# Altium PCB MDBU003_Layout.PcbDoc (part 2 of 2)
Units mil, origin at the board's own origin, x right, y up, seen from the top; angles counter-clockwise.
Board outline 2000 x 2200 mil, 4 copper layers (Component Side, Ground Plane, Power Plane, Solder Side), stack 31.834 mil thick; 88 components, 65 nets, 283 pads, 338 vias.
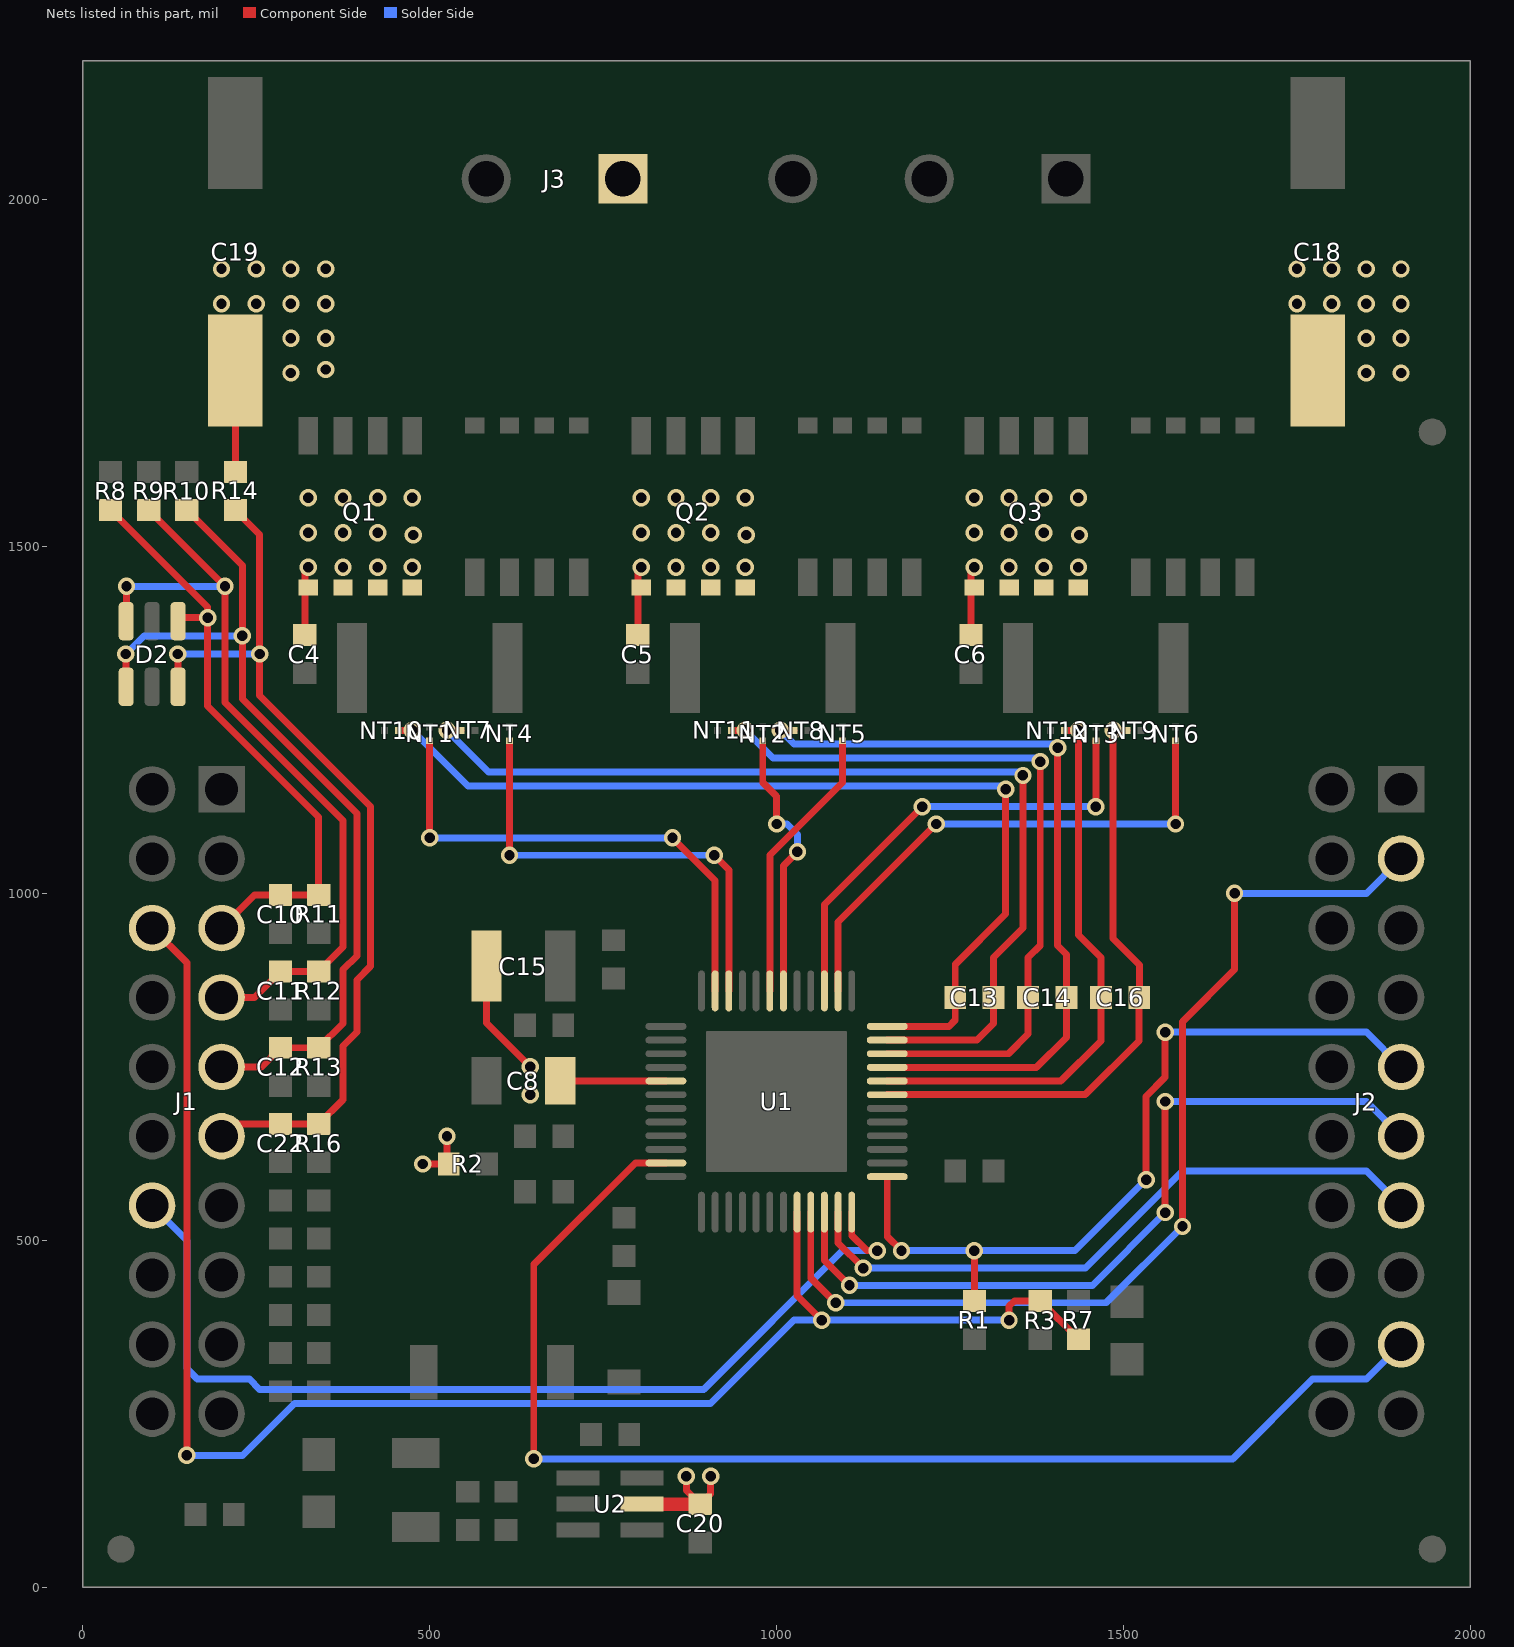
[diagram p4: the nets of this part, all layers, seen from the top]

## Via types
v1: diameter 25, hole 15, Component Side to Solder Side, tented both sides, 313 vias
v2: diameter 25, hole 13, Component Side to Solder Side, tented top, 25 vias

## Nets (pads, with @x,y where several pads share a name; then routed paths per layer and width w, separated by ;. In a path a pad name is that pad's centre, name@x,y a point inside that pad or via, vN(x,y) a via of type N, cw(c..) or ccw(c..) an arc to the next point about the centre after c; other vN are vias at no path point) (continued)
NFAULT: J1.6 R3.1 R7.1 U1.8 | length 2362.8
  Component Side w10: J1.6@100,950 150,900 v1(150,190) ; U1.8@1029.53,540.55 1029.53,420.47 v1(1065,385) ; v1(1335,385) 1335,405 1342.56,412.56 R3.1@1380,412.56 1435,357.56 R7.1@1435,357.44
  Solder Side w10: v1(150,190) 230,190 305,265 905,265 1025,385 v1(1065,385) v1(1335,385)
PVDD: C4.1 C5.1 C6.1 C8.2 C15.1 C18.1 C19.1 C20.1 J3.1 Q1.5 Q1.6 Q1.7 Q1.8 Q2.5 Q2.6 Q2.7 Q2.8 Q3.5 Q3.6 Q3.7 Q3.8 R2.2 R14.2 U1.41 U2.5 | length 1014.5
  Component Side w10: R14.2@220,1607.56 C19.1@220,1753.74 ; C4.1@320,1372.56 320,1465 v1(325,1470) ; v1(490,610) 522.56,610 525,612.44 v1(525,650) ; C15.1@581.85,895 581.85,813.15 v1(645,750) ; C8.2@688.15,730 688.62,729.53 U1.41@840.55,729.53 ; C5.1@800,1372.56 v1@800,1465 ; U2.5@806,120 U2.5@806.44,119.56 ; v1(870,160) 870,139.56 C20.1@890,119.56 905,134.56 v1(905,160) ; C6.1@1280,1372.56 1280,1465 v1(1285,1470)
  Component Side w20: U2.5@806.44,119.56 C20.1@890,119.56
  other v1: 645,710 375,1470 425,1470 475,1470 805,1470 855,1470 905,1470 955,1470 1335,1470 1385,1470 1435,1470 476.46,1516.52 956.46,1516.52 1436.46,1516.52 325,1520 375,1520 425,1520 805,1520 855,1520 905,1520 1285,1520 1335,1520 1385,1520 325,1570 375,1570 425,1570 475,1570 805,1570 855,1570 905,1570 955,1570 1285,1570 1335,1570 1385,1570 1435,1570 300,1750 1850,1750 1900,1750 350,1755 300,1800 350,1800 1850,1800 1900,1800 200,1850 250,1850 300,1850 350,1850 1750,1850 1800,1850 1850,1850 1900,1850 200,1900 250,1900 300,1900 350,1900 1750,1900 1800,1900 1850,1900 1900,1900
PWRGD: J2.9 R1.1 U1.13 | length 1167.2
  Component Side w10: U1.13@1159.45,591.73 1159.45,505.55 v1(1180,485) ; R1.1@1285,412.56 v1(1285,485) ; v1(1532.5,587.5) 1532.5,707.5 1560,735 v1(1560,800)
  Solder Side w10: v1(1180,485) v1(1285,485) 1430,485 v1(1532.5,587.5) ; v1(1560,800) 1850,800 J2.9@1900,750
SCLK: J1.14 U1.12 | length 1425.5
  Component Side w10: U1.12@1108.27,540.55 1108.27,506.73 1130,485 v1(1145,485)
  Solder Side w10: J1.14@100,550 150,500 150,315 165,300 240,300 255,285 895,285 1095,485 v1(1145,485)
SCS: J2.3 U1.9 | length 1462.7
  Component Side w10: U1.9@1049.21,540.55 1049.21,445.79 v1(1085,410) ; v1(1585,520) 1585,815 1660,890 v1(1660,1000)
  Solder Side w10: v1(1085,410) 1475,410 v1(1585,520) ; v1(1660,1000) 1850,1000 J2.3@1900,1050
SDI: J2.11 U1.10 | length 1139.7
  Component Side w10: U1.10@1068.9,540.55 1068.9,471.1 v1(1105,435) ; v1(1560,540) v1(1560,700)
  Solder Side w10: v1(1105,435) 1455,435 v1(1560,540) ; v1(1560,700) 1850,700 J2.11@1900,650
SDO: J2.13 U1.11 | length 949.3
  Component Side w10: U1.11@1088.58,540.55 1088.58,496.42 v1(1125,460)
  Solder Side w10: v1(1125,460) 1445,460 1585,600 1850.01,600 J2.13@1900,550
SH_A: NT1.1 U1.35 | length 736
  Component Side w10: v1(500,1080) NT1.1@500,1220 ; v1(850,1080) 911.42,1018.58 U1.35@911.42,859.45
  Solder Side w10: v1(500,1080) v1(850,1080)
SH_B: NT2.1 U1.30 | length 398.4
  Component Side w10: NT2.1@980,1220 980,1160 1000,1140 v1(1000,1100) ; U1.30@1009.84,859.45 1009.84,1039.84 v1(1030,1060)
  Solder Side w10: v1(1000,1100) 1015,1100 1030,1085 v1(1030,1060)
SH_C: NT3.1 U1.27 | length 669
  Component Side w10: U1.27@1068.9,859.45 1068.9,983.9 v1(1210,1125) ; v1(1460,1125) NT3.1@1460,1220
  Solder Side w10: v1(1210,1125) v1(1460,1125)
SL_A: NT4.1 U1.34 | length 664.3
  Component Side w10: v1(615,1055) NT4.1@615,1220 ; v1(910,1055) 931.1,1033.9 U1.34@931.1,859.45
  Solder Side w10: v1(615,1055) v1(910,1055)
SL_B: NT5.1 U1.31 | length 404
  Component Side w10: U1.31@990.16,859.45 990.16,1055.16 1095,1160 NT5.1@1095,1220
SL_C: NT6.1 U1.26 | length 764.1
  Component Side w10: U1.26@1088.58,859.45 1088.58,958.58 v1(1230,1100) ; v1(1575,1100) NT6.1@1575,1220
  Solder Side w10: v1(1230,1100) v1(1575,1100)
SN1: C13.1 NT7.1 U1.23 | length 1415
  Component Side w10: v1(525,1235) NT7.1@545,1235 ; U1.23@1159.45,788.58 1288.58,788.58 1312.56,812.56 C13.1@1312.56,850 1312.56,907.56 1355,950 v1(1355,1170)
  Solder Side w10: v1(525,1235) 585,1175 1350,1175 v1(1355,1170)
SN2: C14.1 NT8.1 U1.21 | length 1129.3
  Component Side w10: v1(1005,1235) NT8.1@1025,1235 ; U1.21@1159.45,749.21 1374.21,749.21 1417.56,792.56 C14.1@1417.56,850 ; v1(1405,1210) 1405,925 1418.05,911.95 C14.1@1418.05,850
  Solder Side w10: v1(1005,1235) 1025,1215 1400,1215 v1(1405,1210)
SN3: C16.1 NT9.1 U1.19 | length 878.5
  Component Side w10: U1.19@1159.45,709.84 1444.84,709.84 1522.56,787.56 C16.1@1522.56,850 ; NT9.1@1505,1235 v1(1485,1235) 1485,935 1523.05,896.95 C16.1@1523.05,850
SP1: C13.2 NT10.1 U1.24 | length 1374.6
  Component Side w10: NT10.1@455,1235 v1(475,1235) ; U1.24@1159.45,808.27 1248.27,808.27 1257.44,817.44 C13.2@1257.44,850 1257.44,897.44 1330,970 v1(1330,1150)
  Solder Side w10: v1(475,1235) 555,1155 1325,1155 v1(1330,1150)
SP2: C14.2 NT11.1 U1.22 | length 1078.3
  Component Side w10: NT11.1@935,1235 v1(955,1235) ; U1.22@1159.45,768.9 1333.9,768.9 1362.44,797.44 C14.2@1362.44,850 1362.44,907.44 1380,925 v1(1380,1190)
  Solder Side w10: v1(955,1235) 995,1195 1375,1195 v1(1380,1190)
SP3: C16.2 NT12.1 U1.20 | length 813
  Component Side w10: U1.20@1159.45,729.53 1409.53,729.53 1467.44,787.44 C16.2@1467.44,850 1467.44,907.56 1435,940 v1(1435,1235) NT12.1@1415,1235
VSEN_A: C10.1 D2.1 J1.5 R8.1 R11.2 | length 883.6
  Component Side w10: R8.1@40,1552.44 180,1412.44 v1(180,1397.44) ; D2.1@137.4,1392.24 142.6,1397.44 v1(180,1397.44) ; J1.5@200,950 247.56,997.56 R11.2@340,997.56 340,1110 180,1270 v1(180,1397.44)
VSEN_B: C11.1 D2.3 J1.7 R9.1 R12.2 | length 1143.3
  Component Side w10: D2.3@62.6,1392.24 63,1392.65 v1(63,1442.44) ; R9.1@95,1552.44 v1(205,1442.44) 205,1275 375,1105 375,922.56 R12.2@340,887.56 C11.1@285,887.56 247.44,850 J1.7@200,850
  Solder Side w10: v1(63,1442.44) v1(205,1442.44)
VSEN_C: C12.1 D2.4 J1.9 R10.1 R13.2 | length 1276.9
  Component Side w10: v1(62,1345) 62,1298.35 D2.4@62.6,1297.76 ; R10.1@150,1552.44 230,1472.44 230,1280 395,1115 395,910 375,890 375,812.56 R13.2@340,777.56 C12.1@285,777.56 257.44,750 J1.9@200,750
  Solder Side w10: v1(62,1345) 88.22,1371.22 v1(230,1371.22)
VSEN_PVDD: C22.1 D2.6 J1.11 R14.1 R16.2 | length 1308.9
  Component Side w10: v1(137,1345) 137,1298.16 D2.6@137.4,1297.76 ; J1.11@200,650 217.56,667.56 R16.2@340,667.56 375,702.56 375,780 395,800 395,875 415,895 415,1125 255,1285 255,1516.95 R14.1@220,1551.95
  Solder Side w10: v1(137,1345) v1(255,1345)
WAKE: J2.17 U1.47 | length 1849.5
  Component Side w10: v1(650,185) 650,465 796.42,611.42 U1.47@840.55,611.42
  Solder Side w10: v1(650,185) 1657.44,185 1772.44,300 1850,300 J2.17@1900,350
pads on no net: FID1.1 FID2.1 FID3.1 J1.1 J1.4 J1.8 J1.10 J1.12 J1.16 J1.18 J1.19 J1.20 J2.5 J2.7 J2.14 J2.16 J2.18 J2.19 J2.20 U2.4

## Polygon pours and split planes (outlines as drawn)
GND on Component Side "TOP_GND" (solid, remove dead copper, pour order 60): 0,2200 2000,2200 2000,0 0,0
PVDD on Component Side "PVDD3" (solid, remove dead copper, pour order 56): 630,768.39 650,768.39 656.61,768.39 660,765 682.24,765 682.24,695 681.81,694.57 630,694.57
PVDD on Component Side "PVDD2" (solid, remove dead copper, pour order 55): 1730,1920 1730,1670 1830,1670 1855.71,1670 1920.71,1735 1920,1735.71 1920,1920
PVDD on Component Side "PVDD1" (solid, remove dead copper, pour order 54): 180,1920 180,1670 265,1670 320,1725 340,1725 350.71,1725 370,1744.29 375,1749.29 375,1920
MOT_A on Component Side "MOT_A" (solid, remove dead copper, pour order 51): 1115,2080 1115,2005 1115,1995 1075,1955 830,1710 775,1710 765.96,1710 728.98,1673.02 728.98,1521.44 551.02,1521.44 550,1522.47 550,1565 550,1590 510,1630 355,1630 355,1690 565,1900 800,1900 910,2010 910,2080
MOT_C on Component Side "MOT_C" (solid, remove dead copper, pour order 53): 1315,2080 1315,1630 1450,1630 1460,1630 1510,1580 1511.02,1578.98 1511.02,1521.44 1688.98,1521.44 1690,1522.47 1690,1695 1690,1865 1475,2080
MOT_B on Component Side "MOT_B" (solid, remove dead copper, pour order 52): 1295,2080 1295,1800 1295,1759.04 1208.98,1673.02 1208.98,1521.44 1031.02,1521.44 1030,1522.47 1030,1585 1030,1586.3 986.3,1630 835,1630 835,1690 1135,1990 1135,2080
GND on Component Side "GND_C" (solid, remove dead copper, pour order 50): 1315,1405 1435,1405 1435,1260 1315,1260
GND on Component Side "GND_B" (solid, remove dead copper, pour order 49): 835,1405 955,1405 955,1260 835,1260
GND on Component Side "GND_A" (solid, remove dead copper, pour order 48): 355,1405 475,1405 475,1260 355,1260
NetNT6_2 on Component Side "SL_C" (solid, remove dead copper, pour order 45): 1645,1490 1525,1490 1510,1490 1505,1485 1505,1410 1505,1400 1485,1380 1485,1295 1485,1275 1485,1260 1645,1260
NetNT5_2 on Component Side "SL_B" (solid, remove dead copper, pour order 47): 1165,1490 1045,1490 1030,1490 1025,1485 1025,1410 1025,1400 1005,1380 1005,1295 1005,1275 1005,1260 1165,1260
NetNT4_2 on Component Side "SL_A" (solid, remove dead copper, pour order 46): 685,1490 565,1490 550,1490 545,1485 545,1410 545,1400 525,1380 525,1295 525,1275 525,1260 685,1260
PVDD on Solder Side "PVDD_C_BOT" (solid, remove dead copper, pour order 59): 1450,1677.17 1450,1425 1270,1425 1270,1677.17
PVDD on Solder Side "PVDD_B_BOT" (solid, remove dead copper, pour order 58): 970,1677.17 970,1425 790,1425 790,1677.17
PVDD on Solder Side "PVDD_A_BOT" (solid, remove dead copper, pour order 57): 490,1677.17 490,1425 310,1425 310,1677.17
GND on Solder Side "GND_BOT" (solid, remove dead copper, pour order 61): 0,2200 2000,2200 2000,0 0,0
MOT_C on Solder Side "MOT_C_BOT" (solid, remove dead copper, pour order 44): 1465,1490 1735,1490 1735,1825 1465,1825
MOT_B on Solder Side "MOT_B_BOT" (solid, remove dead copper, pour order 43): 985,1490 1255,1490 1255,1825 985,1825
MOT_A on Solder Side "MOT_A_BOT" (solid, remove dead copper, pour order 42): 505,1490 775,1490 775,1825 505,1825
GND on Ground Plane (split plane): 1979.9,20.1 20.1,20.1 20.1,2179.9 1979.9,2179.9
PVDD on Power Plane (split plane): 1979.9,20.1 20.1,20.1 20.1,2179.9 1979.9,2179.9

## Keep-outs
Keep-Out Layer:
  lines w10: 0,0 2000,0 ; 0,0 0,0 ; 0,0 0,2200 2000,2200 2000,0 ; 2000,0 2000,0
  text ".Layer_Name" at 577,-858.49 h60

## Other copper
Component Side:
  text ".Layer_Name" at 577,-858.49 h60
Solder Side:
  text ".Layer_Name" at 577,-858.49 h60

## Silkscreen, mask and mechanical layers (free items; w line width, h text height)
Top Overlay:
  text "GND" at 505,1765 h40
  text "PVDD" at 715,1765 h40
  text "MOTA" at 930,1765 h40
  text "MOTB" at 1140,1765 h40
  text "MOTC" at 1365,1765 h40
  text "DRV8305" at 870,925 h40
  text "nFAULT" at 1420,470 h30
  text ".PRJ_Number" at 1212,93 h30
  text "BOOSTXL-DRV8305EVM REVA" at 1210,35 h30
  text "3.3V" at 285,20 h30
  text ".Layer_Name" at 577,-858.49 h60
Bottom Overlay:
  text ".Layer_Name" at 577,-858.49 h60
Top Paste:
  text ".Layer_Name" at 577,-858.49 h60
Bottom Paste:
  text ".Layer_Name" at 577,-858.49 h60
Top Solder:
  text ".Layer_Name" at 577,-858.49 h60
  text ".Layer_Name" at 577,-858.49 h60
Bottom Solder:
  text ".Layer_Name" at 577,-858.49 h60
Drill Guide:
  text ".Layer_Name" at 577,-858.49 h60
Mechanical 1:
  lines w10: 2000,0 2000,2200 ; 2000,0 2000,0 ; 2000,0 0,0 0,2200 2000,2200 ; 2000,2200 2000,2200
  text ".Layer_Name" at 577,-858.49 h60
Mechanical 2:
  rectangle: 125,-400 500,-275
  rectangle: 0,-275 125,-150
  lines w7: 0,-275 1000,-275 ; 125,-400 125,-150 ; 250,-400 250,-150 ; 500,-400 500,-150 ; 750,-400 750,-150 ; 0,-400 0,-150 1000,-150 1000,-400 0,-400
  text ".Layer_Name" at 577,-858.49 h60
Mechanical 3:
  text ".Layer_Name" at 577,-858.49 h60
Mechanical 4:
  text ".Layer_Name" at 577,-858.49 h60
Mechanical 5:
  lines w10: -292,-930.17 6308,-930.17 ; -292,-726.83 6310,-726.83 ; -292,-523.5 -292,-1133.5 3713,-1133.5 6310,-1133.5 6310,-523.5 -291.5,-523.5 -291.5,-1133.5 1284,-1133.5 ; 2173,-1133.5 2173,-523.5 ; 3440,-726.83 3440,-523.5 ; 4280,-726.83 4280,-523.5 ; 4902,-1140 4902,-937.17
  text "COMPONENTS MARKED 'DNP' SHOULD NOT BE POPULATED." at 1153.5,-318.5 h60
  text "ASSEMBLY VARIANT:" at 1153,-434 h60
  text ".VariantName" at 2189,-434 h60
  text "PCB VIEWED FROM TOP SIDE" at -228.5,-655.67 h60
  text "BOARD #:" at 2248,-655.67 h60
  text ".PRJ_Number" at 2793.5,-655.67 h60
  text "REV:" at 3638,-655.67 h60
  text ".PCB_Rev" at 3929.5,-655.67 h60
  text "SVN REV:" at 4476,-655.67 h60
  text ".VersionControl_RevNumber" at 4982,-655.67 h60
  text "PLOT NAME =" at -228.5,-1064.34 h60
  text ".plot_File_Name" at 577,-1064.34 h60
  text "GENERATED    :" at 2250,-1064.34 h60
  text ".Print_Date" at 3119.5,-1064.34 h60
  text ".Print_Time" at 3848.5,-1064.34 h60
  text "TEXAS INSTRUMENTS" at 5113,-1064.34 h60
Mechanical 6:
  lines w10: -292.5,-727.33 6309.5,-727.33 ; -290.5,-930.67 6309.5,-930.67 ; 1115.5,-1140.5 1115.5,-937.67 ; 1737.5,-727.33 1737.5,-524 ; 2577.5,-727.33 2577.5,-524 ; 3844.5,-1134 3844.5,-524 ; 4733.5,-1134 6309,-1134 6309,-524 -292.5,-524 -292.5,-1134 2304.5,-1134 6309.5,-1134 6309.5,-524
  text "COMPONENTS MARKED 'DNP' SHOULD NOT BE POPULATED." at 6102,-318 h60
  text ".VariantName" at 5058,-434 h60
  text "ASSEMBLY VARIANT:" at 6097,-434 h60
  text ".VersionControl_RevNumber" at 1035.5,-656.17 h60
  text "SVN REV:" at 1541.5,-656.17 h60
  text ".PCB_Rev" at 2088,-656.17 h60
  text "REV:" at 2379.5,-656.17 h60
  text ".PRJ_Number" at 3224,-656.17 h60
  text "BOARD #:" at 3769.5,-656.17 h60
  text "PCB VIEWED FROM BOTTOM SIDE" at 6246,-656.17 h60
  text "TEXAS INSTRUMENTS" at 904.5,-1064.84 h60
  text ".Print_Time" at 2169,-1064.84 h60
  text ".Print_Date" at 2898,-1064.84 h60
  text "GENERATED    :" at 3767.5,-1064.84 h60
  text ".plot_File_Name" at 5440.5,-1064.84 h60
  text "PLOT NAME =" at 6246,-1064.84 h60
Mechanical 9:
  drawing of 57 lines, arcs and shapes, not listed
  text "1" at 739.84,8036.5 h70
  text "2" at 3235.5,8036.5 h70
  text "3" at 5724.84,8036.5 h70
  text "4" at 8231.51,8036.5 h70
  text "5" at 10730.5,8036.5 h70
  text "6" at 13235.5,8036.5 h70
  text "A" at -416.5,6893.5 h70
  text "A" at 14383.5,6893.5 h70
  text "B" at -416.5,4513.5 h70
  text "B" at 14383.5,4513.5 h70
  text "C" at -416.5,2138.5 h70
  text "C" at 14383.5,2138.5 h70
  text "PROJECT TITLE:" at 11343.5,277.5 h45
  text ".PRJ_Title" at 11393.5,144.17 h70
  text "DESIGNED FOR:" at 11343.5,-23.5 h45
  text ".PRJ_Customer" at 11393.5,-163.5 h70
  text "D" at -416.5,-231.5 h70
  text "D" at 14383.5,-231.5 h70
  text "FILE NAME:" at 11343.5,-323.5 h45
  text ".PCB_File_Name_No_Path" at 11393.5,-443.5 h70
  text "Texas Instruments (TI) and/or its licensors do not warrant the accuracy or completeness of this specification" at 6374,-605.34 h45
  text "ENGINEER:" at 11343.5,-613.5 h45
  text "LAYOUT BY:" at 12848.5,-613.5 h45
  text "or any information contained therein. TI and/or its licensors do not warrant that this design will meet" at 6329.01,-718 h45
  text ".PRJ_Engineer" at 11393.5,-768.49 h70
  text ".PCB_Layout" at 12899,-768.49 h70
  text "the specifications, will be suitable for your application or fit for any particular purpose, or will operate in" at 6329.01,-830.67 h45
  text ".Layer_Name" at 577,-858.49 h60
  text "ALTIUM DESIGNER VERSION:" at 12848.5,-923.5 h45
  text "an implementation. TI and/or its licensors do not warrant that the design is production worthy. You should" at 6329.01,-943.33 h45
  text "completely validate and test your design implementation to confirm the system functionality for your application." at 6374,-1056 h45
  text ".print_Scale" at 11393.5,-1056.83 h70
  text ".Application_BuildNumber" at 12899,-1056.83 h70
  text "1" at 739.84,-1263.5 h70
  text "2" at 3235.5,-1263.5 h70
  text "3" at 5724.84,-1263.5 h70
  text "4" at 8231.51,-1263.5 h70
  text "5" at 10730.5,-1263.5 h70
  text "6" at 13235.5,-1263.5 h70
Mechanical 10:
  drawing of 185 lines, arcs and shapes, not listed
  text "DESIGN INFORMATION" at 12381.02,5910 h60
  text "MIN. TRACK WIDTH:" at 11736.46,5730 h60
  text "8" at 12832.7,5730 h60
  text "MIL" at 12987.46,5730 h60
  text "MIN. CLEARANCE:" at 11736.46,5598 h60
  text "0.2" at 12772.7,5598 h60
  text "mm" at 12987.46,5598 h60
  text "MIN. VIA PAD SIZE:" at 11736.46,5466 h60
  text "24" at 12802.71,5466 h60
  text "MIL" at 12987.46,5466 h60
  text "0.05mm (2MIL)" at 12431.46,5324.29 h60
  text "MINIMUM ANNULAR RING" at 11407.23,5320 h60
  text "EXTERNAL" at 13139.46,5320 h60
  text "PER" at 11607.23,5202 h60
  text "IPC-D-275 CLASS 2 LEVEL C" at 11827.23,5202 h60
  text "MIL, HOLES" at 13315.46,5089.71 h60
  text "+/-" at 12923,5089 h60
  text "+/-" at 13777,5089 h60
  text "REGISTRATION TOLERANCES:" at 11407.23,5084 h60
  text "METAL" at 12607,5084 h60
  text "5" at 13183.2,5084 h60
  text "3" at 14016.2,5084 h60
  text "MIL" at 14132.46,5084 h60
  text "MATERIAL:" at 11332.46,4874.54 h60
  text "FR-4 High Tg" at 12318.9,4734.21 h60
  text "FR-408" at 11753.46,4725.64 h60
  text "X" at 12165.46,4725.64 h60
  text "OTHER" at 13241.46,4725.64 h60
  text "62 MIL (1.6mm) +/-10%" at 12073.56,4562.92 h60
  text "THICKNESS:" at 11407.23,4558.64 h60
  text "X" at 11945.4,4558.64 h60
  text "OTHER" at 13358.46,4558.64 h60
  text "TOLERANCE:" at 11407.23,4400.64 h60
  text "X" at 12246.53,4400.64 h60
  text "ANSI IPC-6012 TYPE 3 CLASS 2" at 12433.48,4400.64 h60
  text "OTHER +/-" at 12433.46,4244.64 h60
  text "BOW & TWIST:" at 11407.23,4087.64 h60
  text "X" at 12246.53,4087.64 h60
  text "ANSI IPC-6012 TYPE 3 CLASS 2" at 12433.48,4087.64 h60
  text "OTHER +/-" at 12433.46,3929.13 h60
  text "DRILLING:" at 11332.46,3790.64 h60
  text "REFERENCE:" at 11407.23,3673.64 h60
  text "X" at 12055.46,3673.64 h60
  text "AS SHOWN" at 12242.46,3673.64 h60
  text "X" at 12956.46,3673.64 h60
  text "NC_DRILL FILES" at 13093.46,3673.64 h60
  text "PTH MIN COPPER THICKNESS:" at 11407.23,3515.64 h60
  text "X" at 12757.46,3515.64 h60
  text "1MIL" at 12894.46,3515.64 h60
  text "OTHER" at 13391.46,3515.64 h60
  text "BOARD FINISH:" at 11332.46,3356.64 h60
  text "SILKSCREEN:" at 11487.68,3238.64 h60
  text "X" at 12436.46,3238.64 h60
  text "TOP" at 12562.46,3238.64 h60
  text "X" at 12946.46,3238.64 h60
  text "BOTTOM" at 13073.46,3238.64 h60
  text "SILKSCREEN COLOR:" at 11487.68,3071.64 h60
  text "X" at 12435.42,3071.64 h60
  text "WHITE" at 12562.46,3071.64 h60
  text "OTHER" at 13073.46,3071.64 h60
  text "SOLDER RESIST COLOR:" at 11487.68,2901.64 h60
  text "RED" at 13773.46,2748.44 h60
  text "X" at 13163,2745 h60
  text "GREEN" at 12182.46,2742.44 h60
  text "BLUE" at 12773.46,2742.44 h60
  text "OTHER" at 13311.46,2742.44 h60
  text "IMMERSION GOLD (ENIG)" at 12393.46,2553.92 h60
  text "ENEPIG" at 13731,2550.64 h60
  text "SURFACE FINISH:" at 11332.46,2549.64 h60
  text "X" at 12206.51,2549.64 h60
  text "IMM. TIN/SILVER OR EQUIV" at 11662,2392.64 h60
  text "OTHER" at 13093.46,2392.64 h60
  text "ARRAY/PANEL:" at 11332.46,2213.64 h60
  text "CUT AND TRIM PER MECH LAYER 1" at 12393.46,2209.35 h60
  text "N.C. ROUTE" at 12393.46,2057.64 h60
  text "X" at 13072.46,2057.64 h60
  text "V. SCORE" at 13259.46,2057.64 h60
  text "CERTIFICATION:" at 11332.46,1920.64 h60
  text "MATERIALS AND WORKMANSHIP FOR ALL PCBS" at 12057.46,1920.64 h60
  text "TO MEET OR EXCEED THE REQUIREMENTS OF:" at 12057.46,1822.64 h60
  text "X" at 11683.96,1686.13 h60
  text "ANSI IPC-A-600F CLASS ->" at 11822.96,1686.13 h60
  text "X" at 13462.02,1686.13 h60
  text "2" at 13580.96,1686.14 h60
  text "1" at 13265.96,1684.64 h60
  text "3" at 13934.96,1684.64 h60
  text "X" at 11686.02,1526.64 h60
  text "UL 94V-0" at 11822.96,1526.64 h60
  text "X" at 12498.02,1526.64 h60
  text "RoHS" at 12634.96,1526.64 h60
  text "OTHER" at 13279.36,1526.64 h60
  text "PER ORDER" at 13676.42,1526.64 h60
  text "ADDITIONAL REQUIREMENTS:" at 11332.46,1385.64 h60
  text "MICROSECTION:" at 11407.23,1270.64 h60
  text "YES" at 12312.96,1270.64 h60
  text "REQUIRED" at 13174.46,1114.49 h60
  text "BARE BOARD ELEC. TEST:" at 11407.23,1111.64 h60
  text "NONE" at 12712.96,1111.64 h60
  text "X" at 13047.46,1111.64 h60
  text "PER ORDER" at 13766.46,1111.64 h60
  text "MANUFACTURER'S UL:" at 11407.23,954.64 h60
  text "RAIL" at 12572.96,950.35 h60
  text "METAL" at 13064.77,950.35 h60
  text "X" at 13440,950 h60
  text "SILK" at 13576.46,950.35 h60
  text ".Layer_Name" at 577,-858.49 h60
Mechanical 11:
  lines w10: -292,-930.17 6308,-930.17 ; -292,-726.83 6310,-726.83 ; -292,-523.5 -292,-1133.5 3713,-1133.5 6310,-1133.5 6310,-523.5 -291.5,-523.5 -291.5,-1133.5 1284,-1133.5 ; 2173,-1133.5 2173,-523.5 ; 3440,-726.83 3440,-523.5 ; 4280,-726.83 4280,-523.5 ; 4902,-1140 4902,-937.17
  text "ALL ARTWORK VIEWED FROM TOP SIDE" at -228.5,-655.67 h60
  text "BOARD #:" at 2248,-655.67 h60
  text ".PRJ_Number" at 2793.5,-655.67 h60
  text "REV:" at 3638,-655.67 h60
  text ".PCB_Rev" at 3929.5,-655.67 h60
  text "SVN REV:" at 4476,-655.67 h60
  text ".VersionControl_RevNumber" at 4982,-655.67 h60
  text "LAYER NAME =" at -228.5,-858.49 h60
  text "PLOT NAME =" at -228.5,-1064.34 h60
  text ".plot_File_Name" at 577,-1064.34 h60
  text "GENERATED    :" at 2250,-1064.34 h60
  text ".Print_Date" at 3119.5,-1064.34 h60
  text ".Print_Time" at 3848.5,-1064.34 h60
  text "TEXAS INSTRUMENTS" at 5113,-1064.34 h60
Mechanical 12:
  drawing of 295 lines, arcs and shapes, not listed
  text "Layer" at 81.35,4317 h60
  text "Name" at 491.26,4317 h60
  text "Material" at 1431,4317 h60
  text "Thickness" at 2290.77,4317 h60
  text "Constant" at 2940.6,4317 h60
  text "Board Layer Stack" at 3510.46,4317 h60
  text "1" at 81.35,4197 h60
  text "Top Overlay" at 491.26,4197 h60
  text "2" at 81.35,4077 h60
  text "Top Solder" at 491.26,4077 h60
  text "Solder Resist" at 1431,4077 h60
  text "0.40mil" at 2290.77,4077 h60
  text "3.5" at 2940.6,4077 h60
  text "3" at 81.35,3957 h60
  text "Component Side" at 491.26,3957 h60
  text "Copper" at 1431,3957 h60
  text "2.00mil" at 2290.77,3957 h60
  text "4" at 81.35,3837 h60
  text "Dielectric 1" at 491.26,3837 h60
  text "FR-4" at 1431,3837 h60
  text "10.00mil" at 2290.77,3837 h60
  text "4.2" at 2940.6,3837 h60
  text "5" at 81.35,3717 h60
  text "Ground Plane" at 491.26,3717 h60
  text "Copper" at 1431,3717 h60
  text "1.42mil" at 2290.77,3717 h60
  text "6" at 81.35,3597 h60
  text "Dielectric 3" at 491.26,3597 h60
  text "5.00mil" at 2290.77,3597 h60
  text "4.2" at 2940.6,3597 h60
  text "7" at 81.35,3477 h60
  text "Power Plane" at 491.26,3477 h60
  text "Copper" at 1431,3477 h60
  text "1.42mil" at 2290.77,3477 h60
  text "8" at 81.35,3357 h60
  text "Dielectric 4" at 491.26,3357 h60
  text "10.00mil" at 2290.77,3357 h60
  text "4.2" at 2940.6,3357 h60
  text "9" at 81.35,3237 h60
  text "Solder Side" at 491.26,3237 h60
  text "Copper" at 1431,3237 h60
  text "2.00mil" at 2290.77,3237 h60
  text "10" at 81.35,3117 h60
  text "Bottom Solder" at 491.26,3117 h60
  text "Solder Resist" at 1431,3117 h60
  text "0.40mil" at 2290.77,3117 h60
  text "3.5" at 2940.6,3117 h60
  text "11" at 81.35,2997 h60
  text "Bottom Overlay" at 491.26,2997 h60
  text ".Layer_Name" at 577,-858.49 h60
Mechanical 13:
  text ".Layer_Name" at 577,-858.49 h60
Mechanical 14:
  text ".Layer_Name" at 577,-858.49 h60
Mechanical 15:
  text ".Layer_Name" at 577,-858.49 h60
Mechanical 16:
  text ".Layer_Name" at 577,-858.49 h60
Drill Drawing:
  lines w1: 5667.61,2760.66 5680.05,2760.66 5692.5,2748.22 5704.94,2760.66 5717.39,2760.66 5704.94,2773.11 5717.39,2785.55 5704.94,2785.55 5692.5,2798 5680.05,2785.55 5667.61,2785.55 5680.05,2773.11 5667.61,2760.66 ; 5667.61,2947.33 5717.39,2947.33 5692.5,2897.55 5667.61,2947.33 ; 5667.61,3046.89 5692.5,3059.33 5717.39,3046.89 5704.94,3071.78 5717.39,3096.67 5692.5,3084.22 5667.61,3096.67 5680.05,3071.78 5667.61,3046.89 ; 5667.61,3196.23 5717.39,3196.23 5717.39,3246 5667.61,3246 5667.61,3196.23 ; 5667.83,2760.64 5680.27,2760.64 5692.72,2748.2 5705.16,2760.64 5717.6,2760.64 5705.16,2773.08 5717.6,2785.53 5705.16,2785.53 5692.72,2797.97 5680.27,2785.53 5667.83,2785.53 5680.27,2773.08 5667.83,2760.64 ; 5667.83,2947.29 5717.6,2947.29 5692.72,2897.52 5667.83,2947.29 ; 5667.83,3046.84 5692.72,3059.28 5717.6,3046.84 5705.16,3071.72 5717.6,3096.61 5692.72,3084.17 5667.83,3096.61 5680.27,3071.72 5667.83,3046.84 ; 5667.83,3196.16 5717.6,3196.16 5717.6,3245.93 5667.83,3245.93 5667.83,3196.16
  lines w12: 5599.77,2703.42 7718.02,2703.42 5600,2703.4 ; 5599.77,3300.76 7718.02,3300.76 ; 5600,3300.68 7718.02,3300.68 ; 5970.17,2554.08 5970.17,3450.1 ; 5970.36,2554.08 5970.36,3450 ; 6327.21,2554.08 6327.21,3450.1 ; 6327.36,2554.08 6327.36,3450 ; 6988.85,2554.08 6988.85,3450.1 ; 6988.93,2554.08 6988.93,3450 ; 7273.02,2554.08 7273.02,3450.1 ; 7273.07,2554.08 7273.07,3450 ; 7718.02,2554.08 5600,2554.08 5600,3450 7718.02,3450 7718.02,2554.08 ; 7718.02,2554.08 5599.77,2554.08 5599.77,3450.1 7718.02,3450.1 7718.02,2554.08
  text "Symbol" at 5689.59,3345.48 h72
  text "Symbol" at 5689.59,3345.48 h72
  text "Quantity" at 6015.16,3345.48 h72
  text "Quantity" at 6015.16,3345.48 h72
  text "Finished Hole Size" at 6372.16,3345.48 h72
  text "Finished Hole Size" at 6372.16,3345.48 h72
  text "Plated" at 7033.72,3345.48 h72
  text "Plated" at 7033.72,3345.48 h72
  text "Hole Type" at 7317.86,3345.48 h72
  text "Hole Type" at 7317.86,3345.48 h72
  text "25" at 6015.16,3196.16 h60
  text "25" at 6015.16,3196.16 h60
  text "13.00mil (0.330mm)" at 6372.16,3196.16 h60
  text "13.00mil (0.330mm)" at 6372.16,3196.16 h60
  text "PTH" at 7033.72,3196.16 h60
  text "PTH" at 7033.72,3196.16 h60
  text "Round" at 7317.86,3196.16 h60
  text "Round" at 7317.86,3196.16 h60
  text "313" at 6015.16,3046.84 h60
  text "313" at 6015.16,3046.84 h60
  text "15.00mil (0.381mm)" at 6372.16,3046.84 h60
  text "15.00mil (0.381mm)" at 6372.16,3046.84 h60
  text "PTH" at 7033.72,3046.84 h60
  text "PTH" at 7033.72,3046.84 h60
  text "Round" at 7317.86,3046.84 h60
  text "Round" at 7317.86,3046.84 h60
  text "40" at 6015.16,2897.52 h60
  text "40" at 6015.16,2897.52 h60
  text "47.24mil (1.200mm)" at 6372.16,2897.52 h60
  text "47.24mil (1.200mm)" at 6372.16,2897.52 h60
  text "PTH" at 7033.72,2897.52 h60
  text "PTH" at 7033.72,2897.52 h60
  text "Round" at 7317.86,2897.52 h60
  text "Round" at 7317.86,2897.52 h60
  text "5" at 6015.16,2748.2 h60
  text "5" at 6015.16,2748.2 h60
  text "51.18mil (1.300mm)" at 6372.16,2748.2 h60
  text "51.18mil (1.300mm)" at 6372.16,2748.2 h60
  text "PTH" at 7033.72,2748.2 h60
  text "PTH" at 7033.72,2748.2 h60
  text "Round" at 7317.86,2748.2 h60
  text "Round" at 7317.86,2748.2 h60
  text "383 Total" at 6015.16,2598.88 h60
  text "383 Total" at 6015.16,2598.88 h60
  text ".Layer_Name" at 577,-858.49 h60

## Dimensions
0,0 to 2000,0 on Mechanical 2
0,0 to 0,2200 on Mechanical 2
0,-400 to 1000,-400 on Mechanical 2

## Text inside footprints (layer, text, board x,y; h text height)
Logo2: Bottom Overlay "Pb" at 329.6,81.1 h60
Logo3: Bottom Overlay "For evaluation only; not FCC approved for resale." at 1698.94,84.38 h60
ZZ1: Mechanical 5 "Install label in silkscreened box after final wash.  Text shall be 8 pt font.  Text shall be per the Label Table in the PDF schematic." at 72,2644 h40